# Altium PCB x-IMU3-SA-Sync.PcbDoc
Units mm, origin at the board's own origin, x right, y up, seen from the top; angles counter-clockwise.
Board outline 14 x 12 mm, 2 copper layers (Top Layer, Bottom Layer), stack 1.569 mm thick; 11 components, 8 nets, 27 pads, 3 vias.
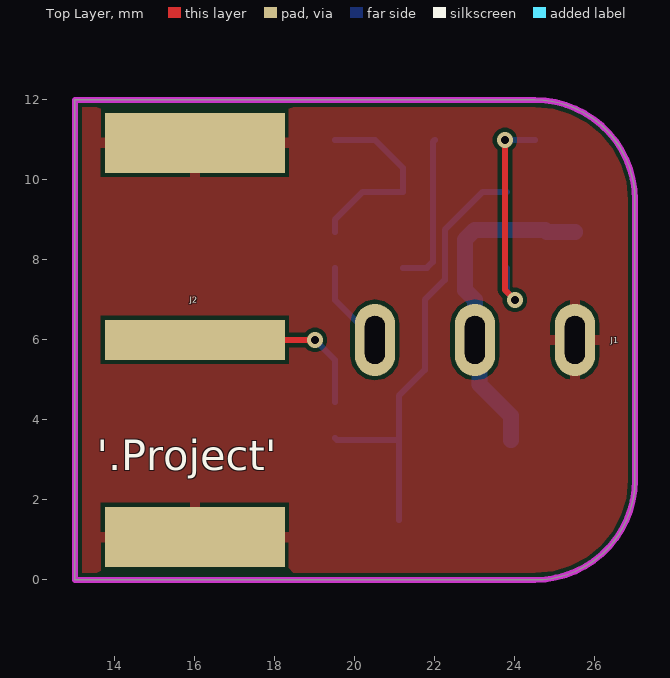
[diagram p0: Top Layer view]
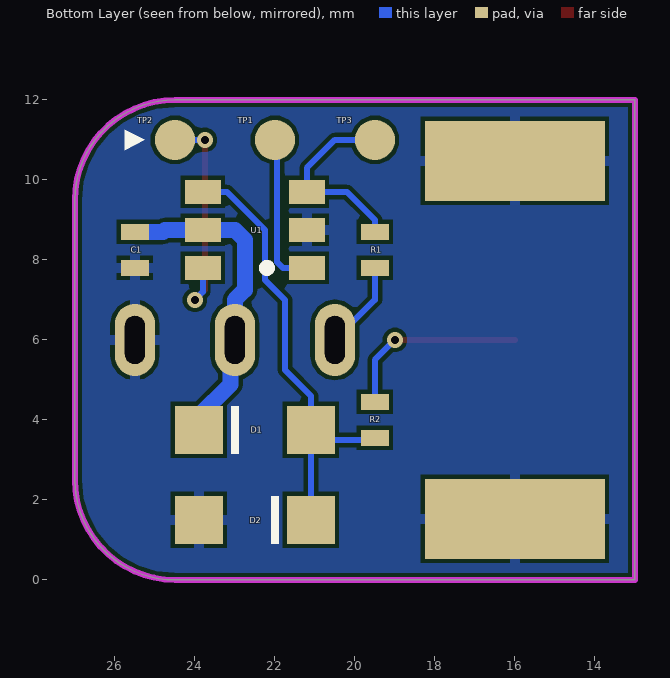
[diagram p1: Bottom Layer view, seen from below]

## Layer stack, top to bottom
Top Solder: solder mask 0.0254, SM-001, Dk 4
Top Layer: signal copper 0.035
Dielectric 1: core 1.4986, Core-043, Dk 4.3
Bottom Layer: signal copper 0.035
Bottom Solder: solder mask 0.0254, SM-001, Dk 4

## Board outline
13,0 24.5,0 ccw(c24.5,2.5) 27,2.5 27,9.5 ccw(c24.5,9.5) 24.5,12 13,12

## Design rules (kind name [scope] priority, off if disabled: settings)
Clearance [All] p1: gap=0.1 ignorepadtopadclearanceinfootprint=FALSE except(0: Arc-Hole Track-Hole SMDPad-Hole THPad-Hole Via-Hole Fill-Hole Poly-Hole Region-Hole Text-Hole)
DiffPairsRouting [All] p1: maxlimit=0.254 minlimit=0.1 mostfreqgap=0.1 toplayer_minwidth=0.1 toplayer_maxwidth=0.381 toplayer_prefwidth=0.1 bottomlayer_minwidth=0.1 bottomlayer_maxwidth=0.381 bottomlayer_prefwidth=0.1 maxuncoupledlength=12.7
MinimumSolderMaskSliver [All] p1: minsoldermaskwidth=0
PlaneClearance [All] p1: clearance=0.2
PlaneConnect [All] p1: planeconnectstyle=Direct reliefexpansion=0.508 reliefentries=4 reliefconductorwidth=0.254 reliefairgap=0.254
PolygonConnect [All] p1: thpad.connectstyle=Relief thpad.reliefconductorwidth=0.254 thpad.reliefentries=4 thpad.polygonreliefangle="90 Angle" thpad.airgapwidth=0.1 smdpad.connectstyle=Relief smdpad.reliefconductorwidth=0.254 smdpad.reliefentries=4 smdpad.polygonreliefangle="90 Angle" smdpad.airgapwidth=0.1 via.connectstyle=Direct via.reliefconductorwidth=0.254 via.reliefentries=4 via.polygonreliefangle="90 Angle" via.airgapwidth=0.254
RoutingVias [All] p1: holewidth=0.711 width=1.27 viastyle="Through Hole" minholewidth=0.2 minwidth=0.4 maxholewidth=0.711 maxwidth=1.27
SilkToSolderMaskClearance [IsPad] p1: minsilkscreentomaskgap=0.1 clearancetoexposedcopper=TRUE
SolderMaskExpansion [All] p1: expansion=0.102 istentingtop=FALSE
Width [All] p1: maxlimit=1 minlimit=0.1 preferedwidth=0.1
25 further rules are at their usual default settings.

## Components (designator, comment, footprint, x,y, rotation, side; value= is the part's Value field where it differs from the comment)
C1 "100nF" "Capacitor 0402" 25.5,8.25 r90 bottom
D1 "PMEG2010ER" SOD-123 22.5,3.75 r0 bottom
D2 "PMEG2010ER" SOD-123 22.5,1.5 r180 bottom
J1 "SP-3533-02" SP-3533-02 23,6 r180 top
J2 "Amphenol 112640" "AMPHENOL 112640" 13,6 r270 top
R1 "470R" "Resistor 0402" 19.5,8.25 r90 bottom
R2 "470R" "Resistor 0402" 19.5,4 r270 bottom
TP1 "Test Point" "Test Point 1mm" 22,11 r180 bottom
TP2 "Test Point" "Test Point 1mm" 24.5,11 r180 bottom
TP3 "Test Point" "Test Point 1mm" 19.5,11 r180 bottom
U1 "PIC10F322-I/OT" SOT-23-6 22.5,8.75 r90 bottom

## Footprints (in the part's own frame and the unit in brackets; to place one, negate y for a bottom-side part, rotate by r counter-clockwise, add the part's x,y. Pads: shape width x height; smd on the part's side, far side on the other; paste and mask are expansions set on the pad)
"AMPHENOL 112640" [mm]
  rect 1.5x4.5 smd: Shield(-4.925,3) Shield(4.925,3)
  rect 2x4.5 smd far side: Shield(-4.475,3) Shield(4.475,3)
  rect 1x4.5 smd: Signal(0,3)
  body extent -5.5,-12.47 5.5,4.5, height 5.9
"Capacitor 0402" [mm]
  rect 0.4x0.7 smd: 1(-0.45,0) 2(0.45,0)
  body extent -0.5,-0.25 0.5,0.25, height 0.48
"Resistor 0402" [mm]
  rect 0.4x0.7 smd: 1(-0.45,0) 2(0.45,0)
  body extent -0.51,-0.25 0.49,0.25, height 0.34
SOD-123 [mm]
  rect 1.2x1.2 smd: A(-1.4,0) K(1.4,0)
  silkscreen extent 0.4,-0.6 0.6,0.6, body extent -1.95,-0.9 1.95,0.9, height 1.18
SOT-23-6 [mm]
  rect 0.6x0.9 smd: 1(-0.95,-1.3) 2(0,-1.3) 3(0.95,-1.3) 4(0.95,1.3) 5(0,1.3) 6(-0.95,1.3)
  silkscreen extent -1.05,-0.4 -0.85,-0.2, body extent -1.4,-1.21 1.39,1.21, height 1.09
SP-3533-02 [mm]
  oval 1x1.8 hole 0.5 slot 1.2 at 90 deg: R(0,0) S(-2.5,0) T(2.5,0)
  body extent -21.85,-2.5 4.75,2.5, height 5
"Test Point 1mm" [mm]
  round 1 smd paste-100: 1(0,0)

## Part data
C1: library part Capacitor
D1 D2: library part Diode
J2: library part BNC
R1 R2: library part Resistor

## Via types
v1: diameter 0.4, hole 0.2, Top Layer to Bottom Layer, tented both sides, 3 vias

## Nets (pads, with @x,y where several pads share a name; then routed paths per layer and width w, separated by ;. In a path a pad name is that pad's centre, name@x,y a point inside that pad or via, vN(x,y) a via of type N, cw(c..) or ccw(c..) an arc to the next point about the centre after c; other vN are vias at no path point)
GND: C1.1 D2.A J1.S J2.Shield U1.2
ICSPDAT: TP1.1 U1.1 | length 3.9
  Bottom Layer w0.15: U1.1 21.8,7.8 21.95,7.95 21.95,10.95 TP1.1
MCLR: TP2.1 U1.6 | length 5.8
  Top Layer w0.15: v1(23.75,11) 23.75,7.25 v1(24,7)
  Bottom Layer w0.15: U1.6@23.75,7.75 U1.6 23.8,7.2 v1(24,7) ; v1(23.75,11) TP2.1
Sync: D1.A D2.K R2.2 U1.4 | length 11.3
  Bottom Layer w0.15: R2.2 19.55,3.5 D1.A@21.1,3.5 ; D2.K D1.A@21.1,3.5 ; U1.4 23.2,9.7 22.25,8.75 22.25,7.5 21.75,7 21.75,5.25 21.1,4.6 D1.A D1.A@21.1,3.5
"Sync R": J2.Signal R2.1 | length 4.8
  Top Layer w0.15: J2.Signal v1(19,6)
  Bottom Layer w0.15: v1(19,6) 19.5,5.5 R2.1
TX: R1.2 TP3.1 U1.3 | length 4.9
  Bottom Layer w0.15: R1.2 19.5,9 20.2,9.7 U1.3 21.2,10.3 20.5,11 TP3.1
"TX R": J1.T R1.1 | length 2.2
  Bottom Layer w0.15: R1.1 19.5,7 J1.T
VDD: C1.2 D1.K J1.R U1.5 | length 8.4
  Bottom Layer w0.4: D1.K@23.9,3.5 D1.K 23.9,4.1 23.115,4.885 23.115,5.885 J1.R 23,7 22.75,7.25 22.75,8.5 23,8.75 U1.5 24.75,8.75 24.8,8.7 C1.2

## Polygon pours and split planes (outlines as drawn)
GND on Bottom Layer "GND_L02_P000" (solid, remove dead copper, pour order 0): 13,0 13,12 27,12 27,0
GND on Top Layer "GND_L01_P001" (solid, remove dead copper, pour order 1): 13,0 13,12 27,12 27,0

## Keep-outs
Keep-Out Layer:
  the board outline again, w0.15

## Silkscreen, mask and mechanical layers (free items; w line width, h text height)
Top Overlay:
  text "'.Project'" at 13.543,2.494 h1.3
Bottom Overlay:
  region: 25.75,11.252 25.75,10.748 25.25,11.002